# Altium PCB 创意时钟.PcbDoc
Units mil, origin at the board's own origin, x right, y up, seen from the top; angles counter-clockwise.
Board outline 3895.03 x 3911.69 mil, 2 copper layers (Top Layer, Bottom Layer); 73 components, 82 nets, 310 pads, 84 vias.
Unrouted connection lines stored in the file: 14.
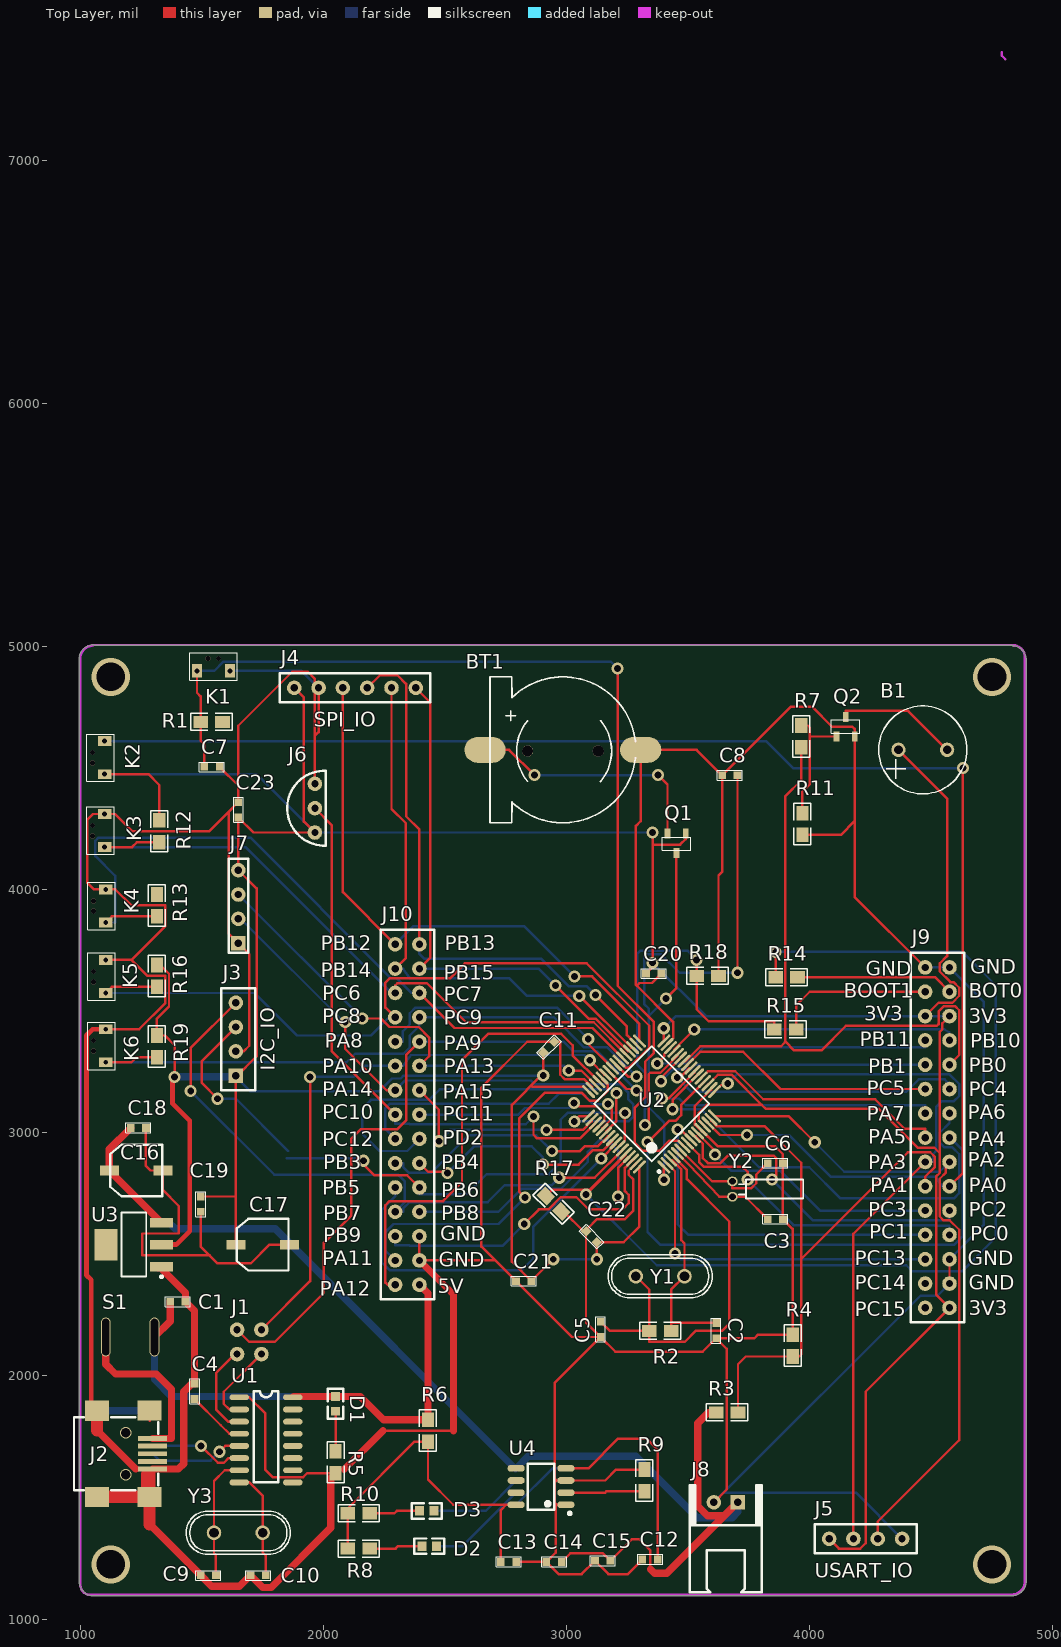
[diagram p0: Top Layer view]
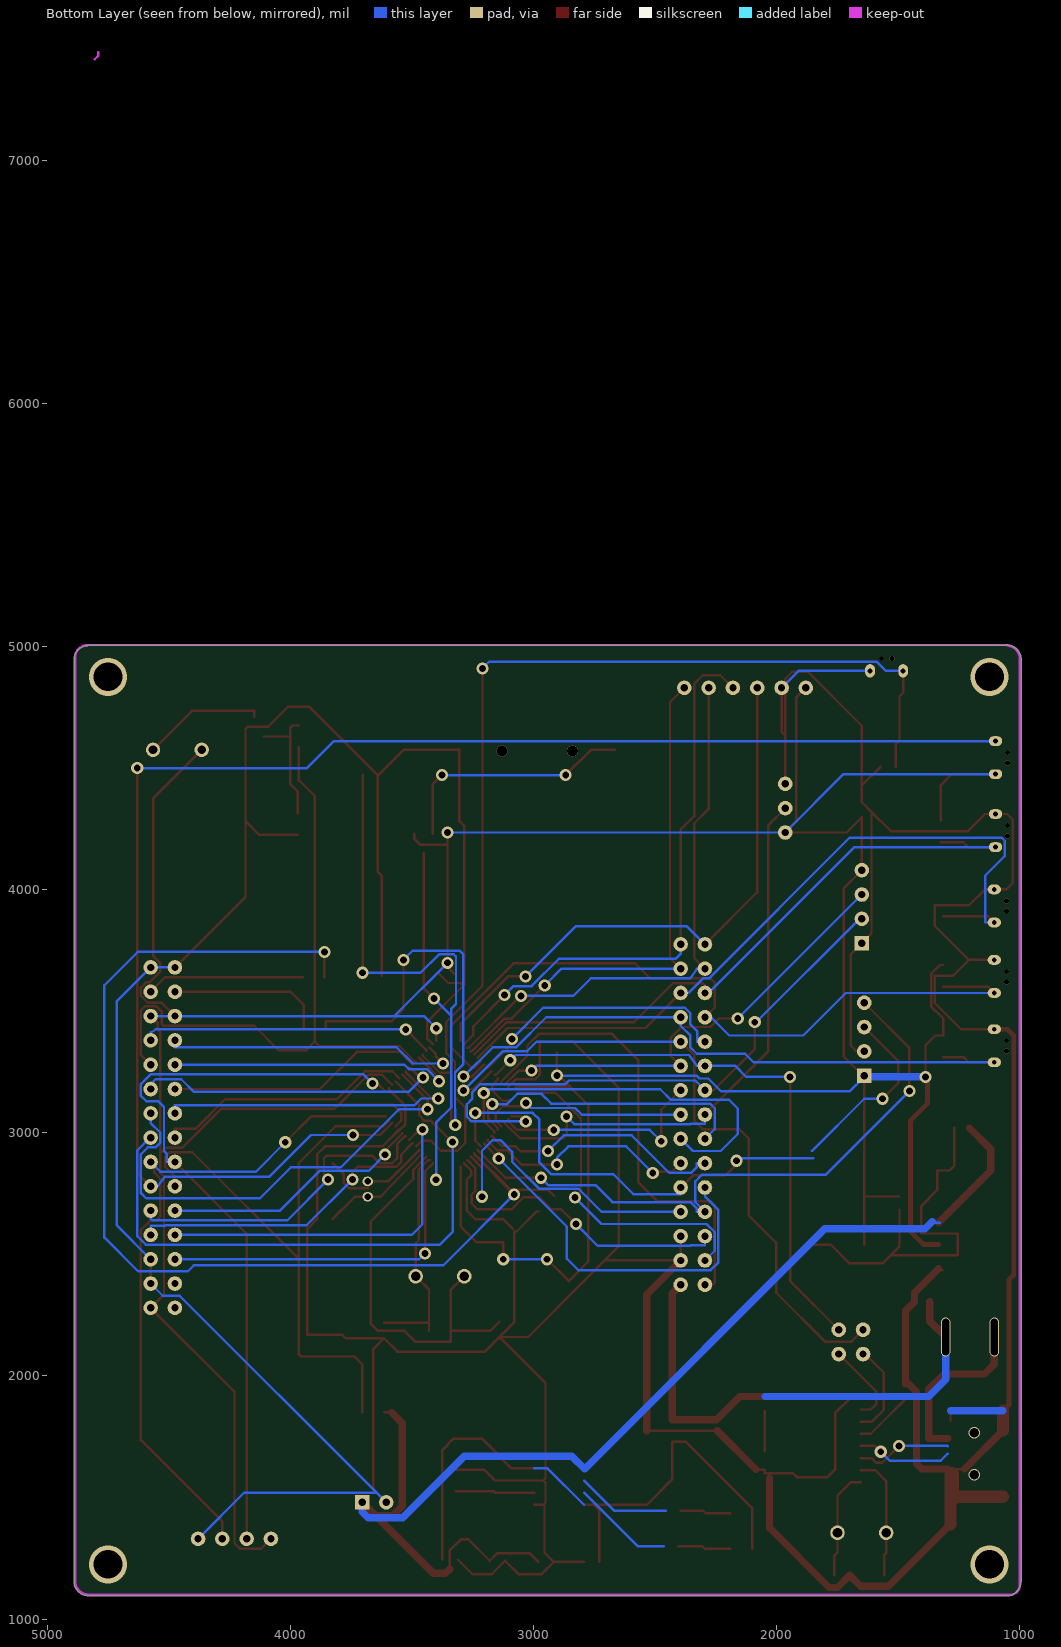
[diagram p1: Bottom Layer view, seen from below]

## Layer stack, top to bottom
Top Solder: solder mask 0.4, Solder Resist, Dk 3.5
Top Layer: signal copper 1.4
Dielectric 1: dielectric 12.6, FR-4, Dk 4.8
Bottom Layer: signal copper 1.4
Bottom Solder: solder mask 0.4, Solder Resist, Dk 3.5

## Board outline
996,1151.97 cw(c1000,1155) 994.99,1155 994.99,4947.64 cw(c1054.02,4947.64) 1054.02,5006.68 cw(c1054.02,5001.66) 1057.75,5005.02 4830,5005.02 cw(c4830,5000) 4833.03,5004 cw(c4830.98,4945) 4890.02,4945 4890.02,1155 cw(c4830.98,1155) 4833.03,1096 cw(c4830,1100) 4830,1094.98 1055,1094.98 cw(c1055,1154.02)

## Design rules (kind name [scope] priority, off if disabled: settings)
Clearance [All] p1: gap=5
PolygonConnect [All] p1: connectstyle=Relief reliefconductorwidth=10 reliefentries=4 polygonreliefangle="90 Angle" airgapwidth=10
RoutingVias [All] p1: holewidth=28 width=50 viastyle="Through Hole" minholewidth=28 minwidth=50 maxholewidth=28 maxwidth=50
SolderMaskExpansion [All] p1: expansion=4
Width [All] p1: maxlimit=200 minlimit=10 preferedwidth=10 minimp=50.000000 maximp=50.000000 favimp=50.000000
29 further rules are at their usual default settings.

## Components (designator, comment, footprint, x,y, rotation, side; value= is the part's Value field where it differs from the comment)
B1 "BEEP" BEEP-9.5X5.5 4465,4575 r0 top
BT1 "CR1220" BATERY 2615,4275 r0 top
C1 "CAP_10P_0603_FIRE" RES_0603_FIRE 1370,2305 r0 top
C2 "CAP_20P_0603_FIRE" CAP_0603_FIRE 3615,2155 r90 top
C3 "CAP_20P_0603_FIRE" CAP_0603_FIRE 3890,2645 r180 top
C4 "CAP_10P_0603_FIRE" RES_0603_FIRE 1470,1905 r90 top
C5 "CAP_20P_0603_FIRE" CAP_0603_FIRE 3140,2160 r90 top
C6 "CAP_20P_0603_FIRE" CAP_0603_FIRE 3890,2875 r180 top
C7 "CAP_20P_0603_FIRE" CAP_0603_FIRE 1510,4505 r0 top
C8 "CAP_10P_0603_FIRE" RES_0603_FIRE 3640,4470 r0 top
C9 "CAP_20P_0603_FIRE" CAP_0603_FIRE 1495,1180 r0 top
C10 "CAP_20P_0603_FIRE" CAP_0603_FIRE 1700,1180 r0 top
C11 "CAP_20P_0603_FIRE" CAP_0603_FIRE 2905,3330 r45 top
C12 "CAP_10P_0603_FIRE" RES_0603_FIRE 3375,1245 r180 top
C13 "CAP_10P_0603_FIRE" RES_0603_FIRE 2730,1235 r0 top
C14 "CAP_10P_0603_FIRE" RES_0603_FIRE 2980,1235 r180 top
C15 "CAP_10P_0603_FIRE" RES_0603_FIRE 3180,1240 r180 top
C16 "CAP+_47UF_FIRE" CAP+_47UF_FIRE 1230,2845 r90 top
C17 "CAP+_47UF_FIRE" CAP+_47UF_FIRE 1750,2540 r90 top
C18 "CAP_10P_0603_FIRE" RES_0603_FIRE 1270,3020 r180 top
C19 "CAP_10P_0603_FIRE" RES_0603_FIRE 1495,2675 r90 top
C20 "CAP_20P_0603_FIRE" CAP_0603_FIRE 3390,3655 r180 top
C21 "CAP_20P_0603_FIRE" CAP_0603_FIRE 2855,2390 r180 top
C22 "CAP_20P_0603_FIRE" CAP_0603_FIRE 3080,2595 r315 top
C23 "CAP_20P_0603_FIRE" CAP_0603_FIRE 1650,4360 r270 top
D1 "LED" 0603_R_JX 2050,1885 r270 top
D2 "LED" 0603_R_JX 2435,1300 r0 top
D3 "LED" 0603_R_JX 2425,1445 r0 top
J1 "mode" mode 1745,2190 r270 top
J2 "USB-MINI" USB_MINI_B_FE_JX 1305,1680 r0 top
J3 "OLED" OLED 1640,3235 r90 top
J4 "SPI_IO" SPI_IO 1880,4830 r0 top
J5 "UART_IO" USART_IO 4080,1330 r0 top
J6 "DS18B20" DS18B20 1965,4435 r270 top
J7 "SWD" SWD 1650,3780 r180 top
J8 "BATTERY" XH_2501R_2P_LOCKED_JX 3655,1480 r180 top
J9 "IO" IO 4575,2280 r180 top
J10 "IO" IO 2295,3775 r0 top
K1 "KEY" KEY 1480,4900 r0 top
K2 "KEY" KEY 1100,4475 r90 top
K3 "KEY" KEY 1100,4175 r90 top
K4 "KEY" KEY 1105,3865 r90 top
K5 "KEY" KEY 1105,3575 r90 top
K6 "KEY" KEY 1105,3290 r90 top
Q1 "BAT54C" SOT-23 3490,4230 r180 top
Q2 "8050" SOT-23 4110,4630 r0 top
R1 "10K" 0805 1585,4690 r180 top
R2 "1M" 0805 3430,2185 r180 top
R3 "1K" 0805 3705,1850 r180 top
R4 "1K" 0805 3930,2170 r270 top
R5 "1K" 0805 2050,1600 r90 top
R6 "0.25R" 0805 2430,1820 r270 top
R7 "1K" 0805 3965,4675 r270 top
R8 "1K" 0805 2190,1290 r180 top
R9 "1.2k" 0805 3320,1615 r270 top
R10 "1K" 0805 2190,1435 r180 top
R11 "10K" 0805 3970,4315 r270 top
R12 "RES" 0805 1325,4195 r90 top
R13 "RES" 0805 1315,3890 r90 top
R14 "510R" 0805 3950,3640 r180 top
R15 "510R" 0805 3855,3425 r0 top
R16 "RES" 0805 1315,3600 r90 top
R17 "10k" 0805 2915,2740 r315 top
R18 "10k" 0805 3535,3645 r0 top
R19 "RES" 0805 1315,3310 r90 top
S1 "Switch" SWITCH 1105,2160 r0 top
U1 "CH340G" SOP16 1610,1545 r0 top
U2 "STM32RCT6" LQFP64 3400,2860 r135 top
U3 "AMS1117" AMS-1117-3.3 1220,2540 r180 top
U4 "TP4056" SOP8_150MIL_JX 2895,1545 r90 top
Y1 "XTAL_8M_FIRE" XTAL_socket 3385,2410 r180 top
Y2 "XTAL_32.768KHZ_FIRE" CRYS-3X8 3690,2800 r180 top
Y3 "XTAL_8M_FIRE" XTAL_socket 1650,1355 r0 top

## Footprints (in the part's own frame and the unit in brackets; to place one, negate y for a bottom-side part, rotate by r counter-clockwise, add the part's x,y. Pads: shape width x height; smd on the part's side, far side on the other; paste and mask are expansions set on the pad)
0603_R_JX [mil]
  rect 36.61x38.58 smd: 1(-30.31,-0.11) 2(30.37,-0.11)
  silkscreen extent -62,-32 62,31
0805 [mil]
  rect 60x50 smd: 1(90,0) 2(0,0)
  silkscreen extent -40,-35 130,35
AMS-1117-3.3 [mm]
  rect 2.4x1 smd: 1(-2.9,2.3) 2(-2.9,0) 3(-2.9,-2.3)
  rect 2.4x3.3 smd: 4(2.9,0)
  silkscreen extent -3.03,-3.35 1.3,3.47
BATERY [mil]
  round 46 hole 46: 0(515,295) 0/2(225,295)
  oval 169.29x106.3 smd: 1(50,300) 2(690,300)
  silkscreen extent 70,0 668,600
BEEP-9.5X5.5 [mm]
  round 1.5 hole 0.9: 1(-2.54,0) 2(2.54,0)
  silkscreen extent -4.6,-4.6 4.6,4.6
CAP+_47UF_FIRE [mm]
  rect 1x2 smd: 1(0,2.8) 2(0,-2.8)
  silkscreen extent -2.7,-2.7 2.7,2.7
CAP_0603_FIRE [mm]
  rect 0.8x0.8 smd: 1(0,0) 2(1.6,0)
  silkscreen extent -0.5,-0.5 2.1,0.5
CRYS-3X8 [mm]
  oval 1.1x1 hole 0.7: 1(0.199,-0.003) 2(0.199,1.597)
  silkscreen extent -7.2,-0.2 -0.5,1.8
DS18B20 [mil]
  round 60 hole 30: 1(0,0) 2(100,0) 3(200,0)
  silkscreen extent -55,-114 256,46
IO [mil]
  round 60 hole 30: 1(0,0) 2(100,0) 3(0,-100) 4(100,-100) 5(0,-200) 6(100,-200) 7(0,-300) 8(100,-300) 9(0,-400) 10(100,-400) 11(0,-500) 12(100,-500) 13(0,-600) 14(100,-600) 15(0,-700) 16(100,-700) 17(0,-800) 18(100,-800) 19(0,-900) 20(100,-900) 21(0,-1000) 22(100,-1000) 23(0,-1100) 24(100,-1100) 25(0,-1200) 26(100,-1200) 27(0,-1300) 28(100,-1300) 29(0,-1400) 30(100,-1400)
  silkscreen extent -60,-1460 160,60
KEY [mil]
  rect 40x55 / inner rect 40x55 / far side oval 40x55 hole 20: 1(0,0) 2(136,0)
  silkscreen extent -30,-39 165,74
LQFP64 [mm] "SOT-223/SC-73; 4 Leads; Body 6.7 x 7.3 mm, inc. leads (LxW max)"
  oval 1.8x0.3 smd: 1(0,0) 2(0,-0.5) 3(0,-1) 4(0,-1.5) 5(0,-2) 6(0,-2.5) 7(0,-3) 8(0,-3.5) 9(0,-4) 10(0,-4.5) 11(0,-5) 12(0,-5.5) 13(0,-6) 14(0,-6.5) 15(0,-7) 16(0,-7.5) 33(11.1,-7.5) 34(11.1,-7) 35(11.1,-6.5) 36(11.1,-6) 37(11.1,-5.5) 38(11.1,-5) 39(11.1,-4.5) 40(11.1,-4) 41(11.1,-3.5) 42(11.1,-3) 43(11.1,-2.5) 44(11.1,-2) 45(11.1,-1.5) 46(11.1,-1) 47(11.1,-0.5) 48(11.1,0)
  oval 0.3x1.8 smd: 17(1.8,-9.3) 18(2.3,-9.3) 19(2.8,-9.3) 20(3.3,-9.3) 21(3.8,-9.3) 22(4.3,-9.3) 23(4.8,-9.3) 24(5.3,-9.3) 25(5.8,-9.3) 26(6.3,-9.3) 27(6.8,-9.3) 28(7.3,-9.3) 29(7.8,-9.3) 30(8.3,-9.3) 31(8.8,-9.3) 32(9.3,-9.3) 49(9.3,1.8) 50(8.8,1.8) 51(8.3,1.8) 52(7.8,1.8) 53(7.3,1.8) 54(6.8,1.8) 55(6.3,1.8) 56(5.8,1.8) 57(5.3,1.8) 58(4.8,1.8) 59(4.3,1.8) 60(3.8,1.8) 61(3.3,1.8) 62(2.8,1.8) 63(2.3,1.8) 64(1.8,1.8)
  silkscreen extent -0.12,-8 9.8,0.82, body extent 0.55,-8.75 10.55,1.25, height 1.6
mode [mil]
  round 60 hole 30: 1(0,0) 2(0,-100) 3(100,0) 4(100,-100)
OLED [mil]
  rect 60x60 hole 30: 1(0,0)
  round 60 hole 30: 2(100,0) 3(200,0) 4(300,0)
  silkscreen extent -60,-80 360,60
RES_0603_FIRE [mm]
  rect 0.8x0.8 smd: 1(0,0) 2(1.6,0)
  silkscreen extent -0.51,-0.53 2.1,0.52
SOP8_150MIL_JX [mm]
  oval 0.7x1.8 smd: 1(-1.905,-2.601) 2(-0.635,-2.601) 3(0.635,-2.601) 4(1.905,-2.601) 5(1.905,2.601) 6(0.635,2.601) 7(-0.635,2.601) 8(-1.905,2.601)
  silkscreen extent -2.95,-3.15 2.4,1.4
SOP16 [mil]
  oval 80x24 smd: 1(44,367) 2(44,317) 3(44,267) 4(44,217) 5(44,167) 6(44,117) 7(44,67) 8(44,17) 9(264,17) 10(264,67) 11(264,117) 12(264,167) 13(264,217) 14(264,267) 15(264,317) 16(264,367)
  silkscreen extent 104,17 204,392
SOT-23 [mm]
  rect 0.6x1.05 smd: 1(0,0) 2(1.9,0) 3(0.965,2.032)
  silkscreen extent -0.55,0.35 2.45,1.75
SPI_IO [mil]
  round 60 hole 30: 1(0,0) 2(100,0) 3(200,0) 4(300,0) 5(400,0) 6(500,0)
  silkscreen extent -60,-60 560,60
SWD [mil]
  rect 60x60 hole 30: 1(0,0)
  round 60 hole 30: 2(0,-100) 3(0,-200) 4(0,-300)
  silkscreen extent -40,-347 40,40
SWITCH [mil]
  oval 40x160 hole 30 slot 150 at 90 deg: 1(0,0) 2(200,0)
USART_IO [mil]
  round 60 hole 30: 1(0,0) 2(100,0) 3(200,0) 4(300,0)
  silkscreen extent -60,-60 360,60
USB_MINI_B_FE_JX [mm]
  rect 3x0.5 smd: 1(-0.2,1.6) 2(-0.2,0.8) 3(-0.2,0) 4(-0.2,-0.8) 5(-0.2,-1.6)
  rect 2.5x2.1 smd: 5(-6,4.496) 5(-5.999,-4.501) 5(-0.5,4.501) 5(-0.498,-4.501)
  silkscreen extent -8.4,-3.8 0.4,3.8
XH_2501R_2P_LOCKED_JX [mm]
  rect 1.5x1.5 hole 0.81: 1(-1.25,0)
  round 1.5 hole 0.81: 2(1.25,-0.001)
  silkscreen extent -3.75,-1.8 3.75,9.4
XTAL_socket [mil]
  round 60 hole 40: 1(100,0) 2(-100,0)
  silkscreen extent -215,-89 214,89

## Part data
C1 C4 C8 C12 C13 C14 C15 C18 C19: "0603"
J8: library part BATTER
Q2: "NPN"
R1 R2 R3 R4 R5 R6 R7 R8 R9 R10 R11 R14 R15 R17 R18: library part RES
Y1 Y2 Y3: "CRYSTAL"

## Via types
v1: diameter 50, hole 28, Top Layer to Bottom Layer, 66 vias
v2: diameter 21, hole 21, Top Layer to Bottom Layer, 12 vias
v3: diameter 157, hole 118, Top Layer to Bottom Layer, 4 vias
v4: diameter 47.24, hole 39.37, Top Layer to Bottom Layer, 2 vias

## Nets (pads, with @x,y where several pads share a name; then routed paths per layer and width w, separated by ;. In a path a pad name is that pad's centre, name@x,y a point inside that pad or via, vN(x,y) a via of type N, cw(c..) or ccw(c..) an arc to the next point about the centre after c; other vN are vias at no path point)
3V3: B1.1 C11.1 C17.1 C19.2 C20.2 C21.1 C22.2 C23.2 J3.1 J4.1 J5.1 J6.3 J7.4 J9.1 J9.25 J9.26 K2.1 Q1.1 R12.1 R16.1 R19.1 U2.13 U2.19 U2.32 U2.48 U2.64 U3.2 | length 18366.3
  Top Layer w10: K2.1 1280,4475 1325,4430 R12.1 ; R16.1 1329,3690 1365,3654 1365,3520 1315,3470 R19.1 1348,3400 1388,3360 v1(1388,3230) ; C19.2 1636.77,2737.99 ; C17.1 1639.76,2887 1640,2887.24 1640,3230 1725,3315 1725,4005 J7.4 C23.2 1712.01,4235 J6.3 1920,4280 1920,4790 J4.1 ; 2859,3190 3070,3190 U2.48@3080,3180 ; 2905,3270 C11.1 2904,3329 v1(2904,3235) 2895,3235 2775,3115 2775,2470 C21.1 v1(2945,2480) ; v1(3124.54,2480) C22.2 3235.46,2550.46 3299.78,2614.78 U2.64 ; C20.2 3354,3682 v1(3354,3699) v1(3354,4235) ; 3355,4185 3467,4185 3490,4208 Q1.1 ; U2.32 v1(3400,3430) ; U2.13 3544,3050.07 3544,3081.84 3577.16,3115 3803,3115 ; U2.19 3622.1,3238 3680,3238 3803,3115 ; J5.1 4120,1290 4208,1290 4230,1312 4230,1935 J9.1 4520,2335 4520,2820 4535,2835 4535,2916 ; B1.1 4565,4375 4565,3726.57 4535,3696.57 4535,3663.43 4578.43,3620 4591.57,3620 4615,3596.57 4615,3563.43 4586.57,3535 4530,3535 J9.26 ; J9.25 4545,3450 4545,3425 4535,3415 4535,2916 ; 3803,3115 3820,3098 4285,3098 4444,2939 4512,2939 4535,2916
  Top Layer w20: U3.2 1395,2540 1450,2595 1450,3050 1380,3120 1380,3227 v1(1388,3230)
  Bottom Layer w10: K2.1 1725,4475 J6.3 v1(3354,4235) ; J3.1@1640,3230 1700,3170 2228.19,3170 2281.38,3223.19 2318.19,3223.19 2330,3235 v1(2904,3235) ; v1(2945,2480) v1(3124.54,2480) ; v1(3354,3699) 3573,3480 ; v1(3400,3430) 3450,3480 3573,3480 ; J9.25 J9.26 3573,3480
  Bottom Layer w30: v1(1388,3230) J3.1@1640,3230
5V: C1.1 D1.1 J10.30 R6.2 S1.2 U1.16 | length 2280.7
  Top Layer w30: S1.2 1370,2225 C1.1 ; U1.16@1877.31,1915.31 D1.1 2152,1915.31 2247.31,1820 R6.2 2430,2340 J10.30
  Bottom Layer w30: S1.2 1305,1985 1374.69,1915.31 2048.2,1915.31
BATT: C14.1 C15.1 C16.1 C18.2 J8.1 R3.1 U3.3 U4.5 | length 5067.8
  Top Layer w10: C14.1 3015,1270 3150,1270 C15.1 3268,1328 3299,1328 3345,1282 3345,1205 ; 3584,1850 R3.1
  Top Layer w30: C16.1 U3.3 ; C16.1 1119.76,2932.76 C18.2 ; 3345,1205 3362,1188 3412.2,1188 J8.1 ; 3584,1850 3540,1806 3540,1465 3580,1425 3649.2,1425
  Bottom Layer w10: 1330,2630 1370,2630
  Bottom Layer w30: 1360,2635 1390,2605 1802.4,2605 2790,1617.4 2842.6,1670 3285,1670 3538,1417 3681.21,1417 3704.21,1440 J8.1
BOOT0: R14.1 R17.2 U2.60 | length 4617.1
  Top Layer w10: R17.2 2940,2765 3093.42,2765 U2.60 3244.1,2910.34 v1(3079.77,2746) ; R14.1 v1(3860,3744)
  Bottom Layer w10: v1(3079.77,2746) 3370.77,2455 4397,2455 4422,2430 4626,2430 4765,2569 4765,3607 4628,3744 v1(3860,3744)
BOOT1: R15.2 R18.2 U2.28 | length 1931
  Top Layer w10: v1(3322,3032) 3338,3048 3338,3241 3344,3247 3385.89,3247 3455.68,3316.78 U2.28 ; v1(3535,3711) R18.2 3535,3508 3584,3459 3855,3459 R15.2
  Bottom Layer w10: v1(3322,3032) 3322,3096 3323,3097 3323,3248 3290,3281 3290,3734.99 3304,3749 3497,3749 v1(3535,3711)
GND: BT1.2 C1.2 C2.1 C3.1 C4.2 C5.1 C6.1 C7.2 C8.1 C9.1 C10.1 C11.2 C12.2 C13.2 C14.2 C15.2 C20.1 C21.2 C22.1 C23.1 J2.5 J3.2 J4.2 J5.4 J6.1 J7.1 J8.2 J9.3 J9.5 J9.29 J9.30 J10.26 J10.28 K1.2 K3.2 K4.2 K5.2 K6.2 Q2.2 R4.2 R5.2 R9.2 R11.1 R17.1 R18.1 U1.1 U2.12 U2.18 U2.31 U2.47 U2.63 U3.1 U4.1 U4.3 | length 28987.3
  Top Layer w10: K6.2 1242,3426 1350,3534 1350,3645 1276,3645 1210,3711 ; K5.2 1210,3711 ; 1227.99,1617.01 J2.5@1297.14,1617.01 ; J2.5@1280.4,1492.8 J2.5@1285.4,1502.8 ; 1285.32,1815.32 J2.5@1285.32,1857.2 ; U3.1@1318.86,2434.14 U3.1 U3.1@1334.17,2440.83 ; C7.2 1650,4427.99 ; J3.2 1672,3335 1695,3358 1695,3735 J7.1 1610,3820 1610,4320 ; U1.1 1695,1912 1760,1847 1760,1615 1791,1584 1917,1584 1933,1600 R5.2 2050,1615 2085,1615 ; J6.1 1965,4633 ; J4.2 1980,4648 1965,4633 ; 2245,1775 2535,1775 ; J10.26 J10.28 2707.01,2475 ; C13.2 C14.2 ; 2960,1470 2951,1479 2951,1561 2960,1570 ; R17.1 2988,2676.36 3069.36,2595 C22.1 3080,2220 C5.1 ; U4.1 2955,1470 2955,1272.99 C14.2 ; C22.1@3085,2605 3125,2645 3240,2645 3275,2680 3275,2807.54 3256,2826.54 3256,2844.06 U2.63 ; U2.47 3104.91,3188.28 3072.21,3220.97 2992,3220.97 2974,3238.97 2974,3374.54 C11.2 2838.55,3374.54 2650,3185.99 2650,2532.01 C21.2 3022.01,2160 C5.1 ; 3289,3605 3300,3616 3351,3616 C20.1 ; C12.2 3252.01,1185 3172.01,1185 C15.2 3062.01,1185 2967.01,1185 C14.2 ; R9.2 3204,1615 3159,1570 U4.3 2960,1570 ; U2.31 3438,3387.96 3438,3456 3285,3609 3285,4262 3305,4282 BT1.2 3535,4575 C8.1 ; U2.12 3595.44,2970.79 ; U2.18 3594.87,3177.59 3527.19,3109.91 3527.19,3033.69 3551.46,3011.32 3595.44,2970.79 ; J8.2 3659,1533.23 3659,2111 C2.1 ; R18.1 3625,4058 3640,4073 C8.1 ; R11.1 4128,4225 4184.8,4281.8 ; J9.30 4184.8,3970.2 4184.8,4281.8 ; J9.3 J9.5 ; 1210,3711 1350,3851 1350,3935 1210,3935 1144,4001 K4.2 1056,4001 1029,4028 1029,4288 1052,4311 K3.2 1143,4311 1213,4241 1531,4241 1610,4320 ; 1610,4320 C23.1 1650,4427.99 ; 1650,4427.99 1650,4674 1872,4896 1936,4896 1965,4867 1965,4633 ; 2960,1570 2951,1579 2951,1971 C5.1 ; C5.1 3200,2100 3560,2100 C2.1 ; 3595.44,2970.79 3622.23,2944 3858,2944 3890,2912 C6.1 C3.1 3930,2605 R4.2 3788,2170 3773,2155 C2.1 ; C8.1 3923,4753 4009,4753 4092,4670 4176,4670 4184.8,4661.2 Q2.2 4184.8,4281.8
  Top Layer w20: J2.5@1068.78,1857 1045,1880.78 1045,2395 1025,2415 1025,3400 1051,3426 K6.2
  Top Layer w30: 1068.78,1776.22 1227.99,1617.01 ; 1285.4,1389.6 C9.1 1540,1135 1655,1135 C10.1 1750,1130 1785,1130 2030,1375 R5.2@2030,1580 ; J2.5@1297.14,1617.01 1403,1617.01 1425,1639.01 1425,1935 1457.99,1967.99 C4.2 1470,2267.99 C1.2 1432.99,2342.01 U3.1@1334.17,2440.83 ; 2085,1615 2245,1775 ; J10.28 2535,2335 2535,1775
  Top Layer w50: J2.5@1068.8,1502.8 1285.4,1502.8 1285.4,1389.6 ; 1068.78,1776.22 J2.5@1068.78,1857
  Top Layer w60: 1279.98,1595 J2.5@1280.4,1492.8
  Bottom Layer w10: 1068.78,1857 1068.98,1857.2 ; K1.2 1910,4900 J4.2 ; J8.2 3645.77,1520 ; J5.4 4190,1520 3645.77,1520 ; J9.30 J9.29 4715,3540 4715,2620 J9.5 ; J9.3 4525,2330 4455.77,2330 3645.77,1520
  Bottom Layer w30: 1068.98,1857.2 1285.32,1857.2
NetB1_2: B1.2 Q2.3 | length 508.3
  Top Layer w10: Q2.3 4148,4735 4405,4735 B1.2
NetBT1_1: BT1.1 Q1.2 | length 1011.3
  Top Layer w10: BT1.1 2764,4575 v1(2868,4471) ; v1(3376,4471) 3415.2,4431.8 Q1.2
  Bottom Layer w10: v1(2868,4471) v1(3376,4471)
NetC4_1: C4.1 U1.4 | length 243.2
  Top Layer w10: C4.1 1578,1797 1613,1762 U1.4
NetC9_2: C9.2 U1.7 Y3.2 | length 513.5
  Top Layer w10: C9.2 1557.99,1263 1550,1270.99 Y3.2 1550,1568 1594,1612 U1.7
NetC10_2: C10.2 U1.8 Y3.1 | length 451.7
  Top Layer w10: U1.8 1696,1562 1750,1508 Y3.1 1750,1273.99 1762.99,1261 C10.2
NetC12_1: C12.1 C13.1 R6.1 R8.1 R10.1 U4.4 U4.8 | length 2579.8
  Top Layer w10: R8.1 R10.1 2100,1455 2375,1730 R6.1 2430,1574 2534,1470 2752,1470 ; C13.1 2730,1448 2752,1470 ; U4.8 2752,1470 ; U4.4 3090,1620 3212,1742 3329,1742 3375,1696 C12.1
  Bottom Layer w10: 2792.6,1470 2942.6,1620 2997.4,1620
NetC16_2: C16.2 C17.2 C18.1 C19.1 | length 1613.2
  Top Layer w10: C18.1 1270,2864 1289,2845 C16.2@1340,2845 ; C16.2 C16.2@1340,2845 ; C19.1@1495,2683 1495,2533 1565,2463 1701,2463 1778,2540 C17.2 ; 1532,2496 1255,2496 1255,2585.69 1405,2585.69 1405,2699 1340,2764 C16.2@1340,2845
NetD1_2: D1.2 R5.1 | length 164.7
  Top Layer w10: D1.2 2049.89,1772.11 2050,1772 R5.1
NetD2_1: D2.1 R8.2 | length 218.8
  Top Layer w10: R8.2 2297,1290 2306.89,1299.89 D2.1
NetD2_2: D2.2 U4.7 | length 418.4
  Bottom Layer w10: 2465.37,1299.89 2572.49,1299.89 2792.6,1520
NetD3_1: D3.1 R10.2 | length 208.8
  Top Layer w10: R10.2 2292,1435 2301.89,1444.89 D3.1
NetD3_2: D3.2 U4.6 | length 389.1
  Bottom Layer w10: 2455.37,1444.89 2667.49,1444.89 2792.6,1570
NetJ1_3: J1.3 U1.2 | length 342.7
  Top Layer w10: U1.2 1613,1862 1590,1885 1590,1935 J1.3
NetJ1_4: J1.4 U1.3 | length 384.4
  Top Layer w10: J1.4 1636,2090 1560,2014 1560,1860 1608,1812 U1.3
NetJ2_2: J2.2 U1.6 | length 393.5
  Top Layer w10: v1(1497,1712) 1566.01,1642.99 1591,1642.99 1610.01,1662 U1.6
  Bottom Layer w10: 1297.14,1711.5 1297.64,1712 v1(1497,1712)
NetJ2_3: J2.3 U1.5 | length 393.3
  Top Layer w10: v1(1572,1688) 1596,1712 U1.5
  Bottom Layer w10: 1297.14,1680 1325.14,1652 1536,1652 v1(1572,1688)
NetJ9_27: J9.27 R14.2 | length 649.9
  Top Layer w10: R14.2 4515,3640 J9.27
NetJ9_28: J9.28 R15.1 | length 652.8
  Top Layer w10: R15.1 3945,3525 4000,3580 J9.28
NetQ2_1: Q2.1 R7.2 R11.2 | length 512.7
  Top Layer w10: R7.2 3992,4675 4000,4667 4000,4630 ; R11.2 3970,4403 4000,4433 4000,4630 ; Q2.1 4000,4630
NetR9_1: R9.1 U4.2 | length 324.7
  Top Layer w10: U4.2 3159,1520 3164,1525 R9.1
OSC_IN1: C2.2 R2.2 U2.3 Y1.2 | length 937.4
  Top Layer w10: U2.3 3433.18,2887.84 3472,2849.02 3472,2558 3485,2545 Y1.2 3430,2355 3430,2217.99 ; R2.2 3430,2217.99 ; C2.2 3430,2217.99
OSC_IN2: C3.2 U2.5 Y2.2 | length 485.6
  Top Layer w10: U2.5 3457.67,2915.68 3628.87,2737.14 Y2.2 3734.86,2737.14 C3.2
OSC_OUT1: C5.2 R2.1 U2.4 Y1.1 | length 1650.9
  Top Layer w10: C5.2 3177.99,2185 R2.1 ; Y1.1 3340,2355 R2.1 ; U2.4 3441.76,2900.47 3494.66,2847.57 3494.66,2809.66 3670,2634.32 3670,2215 3640,2185 3531,2185 3486,2140 3340,2140 R2.1
OSC_OUT2: C6.2 U2.6 Y2.1 | length 502.3
  Top Layer w10: U2.6 3599.06,2800.14 Y2.1 3682.17,2772.29 3760,2772.29 3780,2792.29 3780,2827.99 C6.2
PA0: J9.11 K2.2 U2.14 | length 6424.3
  Top Layer w10: U2.14 3630.9,2991 v1(3742,2991) ; J9.11 4630,2835 v1(4630,4500)
  Bottom Layer w10: K2.2 3821,4611 3932,4500 v1(4630,4500) ; v1(3742,2991) 3915,2991 4086,2820 4516,2820 4546,2780 J9.11
PA1: J9.12 R3.2 R4.1 U2.15 | length 2587.8
  Top Layer w10: U2.15 3594.87,3049.53 3618.16,3026.24 3815.76,3026.24 3965,2877 3965,2481 ; R3.2 3705,2048 3737,2080 R4.1 3957,2080 3965,2088 3965,2481 ; J9.12 4475,2820 4515,2860 4515,2901 4496,2920 4404,2920 3965,2481
PA2: J5.3 J9.13 U2.16 | length 2830.7
  Top Layer w10: U2.16 3913.21,3068.79 v1(4021,2961) ; J5.3 4280,1401 4615,1736 4615,2601 4576,2640 4551,2640 4535,2656 4535,2811 4560,2836 4560,2865 J9.13
  Bottom Layer w10: v1(4021,2961) 4142,2840 4535,2840 J9.13
PA3: J5.2 J9.14 U2.17 | length 3154.2
  Top Layer w10: U2.17 3636.24,3196.46 3663,3196.46 v1(3663,3203) ; J5.2 4180,2585 J9.14
  Bottom Layer w10: v1(3663,3203) 3700,3240 4575,3240 4615,3200 4615,3152 4593,3130 4544,3130 4520,3106 4520,2925 4508,2913 4508,2880 J9.14
PA4: J9.15 U2.20 | length 2494.1
  Top Layer w10: v1(3333,2962) 3334.34,2962 3421.57,3049.22 3448.22,3049.22 3471,3072 3471,3114.74 U2.20
  Bottom Layer w10: v1(3333,2962) 3333,2592 3385,2540 4595,2540 4630,2575 4630,2927 4577,2980 J9.15
PA5: J9.16 U2.21 | length 1067.8
  Top Layer w10: U2.21 3581.42,3253 3694,3253 3809,3138 4269,3138 4391,3016 4475,3016 J9.16
PA6: J9.17 U2.22 | length 1920.9
  Top Layer w10: v1(3436,3097) 3436,3135.41 U2.22
  Bottom Layer w10: v1(3436,3097) 3553,3097 3792,2858 3998,2858 4126,2730 4593,2730 4615,2752 4615,2912 4587,2940 4555,2940 4535,2960 4535,3000 4575,3040 J9.17
PA7: J9.18 U2.23 | length 1309.9
  Top Layer w10: v1(3392,3141) 3418.54,3141 3525.27,3247.74 U2.23
  Bottom Layer w10: v1(3392,3141) 3462,3141 3490,3113 4475,3113 J9.18
PA8: J10.9 U2.41 | length 1117.7
  Top Layer w10: v1(3089,3386) 3089,3365.87 U2.41
  Bottom Layer w10: J10.9 2326.5,3375 2326.5,3417.29 2355,3445.79 2355,3491.57 2378.43,3515 2960,3515 v1(3089,3386)
PA9: J1.2 J10.10 U2.42 | length 2887.3
  Top Layer w10: J1.2@1642.5,2207.5 J1.2@1662.5,2207.5 ; J1.2 1695,2140 1800,2140 2001.88,2341.88 2001.88,2546.88 2115,2660 2115,2976 2154,3015 2304,3015 2340,3051 2340,3320 J10.10 ; U2.42 3247.03,3180 3282,3180 v1(3288,3174)
  Bottom Layer w10: J10.10 2987,3375 3026,3336 3126,3336 v1(3288,3174)
PA10: J1.1 J10.11 U2.43 | length 2413.1
  Top Layer w10: J1.1 1945,2390 v1(1945,3230) ; v1(3095.77,3298.08) 3155.24,3238.61 U2.43
  Bottom Layer w10: v1@1950,3220 1960,3230 2125,3230 2170,3275 J10.11 2328,3275 2360,3320 3073.85,3320 v1(3095.77,3298.08)
PA11: J10.27 U2.44 | length 1601.7
  Top Layer w10: v1(2829,2734) 2805,2758 2805,3059 2911,3165 3062,3165 3095,3132 3128,3132 3170,3174 3170,3196.02 3146.67,3219.35 U2.44
  Bottom Layer w10: J10.27 2255,2515 2255,2592 2288,2625 2720,2625 v1(2829,2734)
PA12: J10.29 U2.45 | length 1931.7
  Top Layer w10: J10.29 2264,2375 2255,2384 2255,2702 2272,2719 2492,2719 2570,2797 2570,3300 2677,3407 2977.95,3407 3024.95,3360 3024.95,3318.57 U2.45
PA13: J7.3 J10.12 U2.46 | length 1918.8
  Top Layer w10: v1(2160,3470) 2237,3470 2272,3435 2392,3435 2435,3392 2435,3315 J10.12 ; v1(3009,3256) 3060.43,3256 3118.83,3197.6 U2.46
  Bottom Layer w10: J7.3 v1(2160,3470) ; J10.12 2990,3275 v1(3009,3256)
PA14: J7.2 J10.13 U2.49 | length 2422.6
  Top Layer w10: v1(2090,3455) 2090,3345 2260,3175 J10.13 ; v1(3032,3047) 3053.79,3068.79 U2.49
  Bottom Layer w10: J7.2 1660,3880 v1@2087.5,3452.5 ; J10.13 2335,3215 2854,3215 2869,3200 3219,3200 3253,3166 3253,3139 3275,3117 3275,3066.49 3255.51,3047 v1(3032,3047)
PA15: J10.14 U2.50 | length 914.6
  Top Layer w10: J10.14 2475,3095 v1(2475,2965) ; v1(2917,3012) 3067.38,3012 3102.92,3047.54 3102.92,3054.87 U2.50
  Bottom Layer w10: v1(2475,2965) 2522,3012 v1(2917,3012)
PB0: J9.21 R7.1 U2.26 | length 2770
  Top Layer w10: U2.26 3488.86,3294.29 3550.57,3356 3883,3356 3900,3375 ; R7.1 3965,4450 3900,4385 3900,3375 ; J9.21 4615,3320 4615,3504 4599,3520 4551,3520 4530,3499 4530,3447 4523,3440 4149,3440 4048,3339 3936,3339 3900,3375
PB1: J9.22 U2.27 | length 1267.2
  Top Layer w10: v1(3389,3212) v1@3373.39,3212 ; U2.27 v1@3373.39,3212 ; v1@3373.39,3212 3373,3211.61 3373,3212 v1@3373.39,3212
  Bottom Layer w10: v1(3389,3212) 3439,3262 3513,3262 3531,3280 J9.22
PB3: J10.19 U2.55 | length 1021.6
  Top Layer w10: v1(2940.06,2924.94) 3054.67,2924.94 3073.73,2944 3127.89,2944 3169.16,2985.27 U2.55
  Bottom Layer w10: J10.19 2328,2875 2328,2859 2352,2835 2442,2835 2597,2990 2875,2990 v1(2940.06,2924.94)
PB4: J10.20 U2.56 | length 931.1
  Top Layer w10: J10.20 2430,2840 v1@2495,2840 ; v1(2903,2869.36) 3049.36,2869.36 3109,2929 3151.41,2929 3188.42,2966.01 U2.56
  Bottom Layer w10: v1(2510,2835) 2619,2944 2857,2944 2903,2898 v1(2903,2869.36)
PB5: J10.21 U2.57 | length 1602.5
  Top Layer w10: v1(3143,2894) 3202.34,2953.34 U2.57
  Bottom Layer w10: J10.21 2295,2738 2240,2683 2240,2467 2272,2435 2816,2435 2863.31,2482.31 2863.31,2614.31 v1(3143,2894)
PB6: J3.3 J10.22 U2.58 | length 2640.4
  Top Layer w10: v1(1565,3140) 1500,3205 1500,3295 J3.3 ; 2140,2895 2210,2825 2345,2825 J10.22 ; U2.58 3240,2967.25 v1(3240,3082)
  Bottom Layer w10: v1(1565,3140) 1640,3140 1855,2925 ; 1850,2895 v1@2165,2895 ; J10.22 2395,2748 2590,2748 2672,2830 2928,2830 2976,2878 2976,3054 3004,3082 v1(3240,3082)
  other v1: 2165,2885
PB7: J3.4 J10.23 U2.59 | length 2665
  Top Layer w10: v1(1454,3172) 1454,3349 J3.4 ; v1(2970,2815) 3115.59,2815 U2.59
  Bottom Layer w10: v1(1454,3172) 1798,2828 2307,2828 2335,2800 2335,2715 J10.23 2328,2675 2328,2688 2355,2715 2676,2715 2746,2785 2940,2785 v1(2970,2815)
PB8: J10.24 U2.61 | length 1354.3
  Top Layer w10: v1(3212,2737) 3212,2855.74 U2.61
  Bottom Layer w10: J10.24 2720,2675 2814,2769 2976,2769 3088,2881 3088,2922 3136,2970 3168,2970 3212,2926 v1(3212,2737)
PB9: J10.25 U2.62 | length 1310
  Top Layer w10: v1(2826,2625) 2886,2685 2925,2685 2975,2735 3041,2735 3091,2685 3230,2685 3255,2710 3255,2745 3240,2760 3240,2855.9 U2.62
  Bottom Layer w10: J10.25 2295,2537 2353,2537 2355,2535 2736,2535 v1(2826,2625)
PB10: J9.23 U2.29 | length 1209.3
  Top Layer w10: U2.29 3441.76,3341.39 v1(3525.37,3425)
  Bottom Layer w10: v1(3525.37,3425) 4553,3425 4575,3413 J9.23
PB11: J9.24 U2.30 | length 1245.4
  Top Layer w10: v1(3373,3285) 3402,3314 3402,3324.13 U2.30
  Bottom Layer w10: v1(3373,3285) 3496,3285 3563,3352 4475,3352 J9.24
PB12: J4.3 J10.1 U2.33 | length 2415.8
  Top Layer w10: J4.3 2080,3990 J10.1 ; v1(3033,3643) 3104.79,3643 3299.78,3448.01 U2.33
  Bottom Layer w10: J10.1 2369,3849 2827,3849 v1(3033,3643)
PB13: J4.4 J10.2 U2.34 | length 2395.4
  Top Layer w10: J4.4 2232,4882 2304,4882 2340,4846 2340,4302 2395,4247 J10.2 ; v1(3119,3566.8) 3248.23,3437.57 3248.23,3401.51 U2.34
  Bottom Layer w10: J10.2 2395,3736 2416,3715 2896.31,3715 3008,3603.31 3082.49,3603.31 v1(3119,3566.8)
PB14: J4.5 J10.3 U2.35 | length 2313.9
  Top Layer w10: J4.5 2280,4332 2339,4273 2339,3719 J10.3 ; v1(3052,3563) 3053.56,3563 3266.6,3349.96 U2.35
  Bottom Layer w10: J10.3 2328,3675 2355,3635 2765,3635 2837,3563 v1(3052,3563)
PB15: J4.6 J10.4 U2.36 | length 2201.1
  Top Layer w10: J4.6 2439,4771 2439,3719 J10.4 ; v1(2954,3606.01) 3090.46,3469.55 3119.18,3469.55 3252.68,3336.04 U2.36
  Bottom Layer w10: J10.4 2885.01,3675 v1(2954,3606.01)
PC0: J9.7 U2.8 | length 1291.8
  Top Layer w10: U2.8 3545,2909.87 3545,2880 3565,2860 3724,2860 3745,2839 v1(3745,2808)
  Bottom Layer w10: v1(3745,2808) 3933,2620 4515,2620 4517,2618 4575,2618 J9.7
PC1: J9.8 U2.9 | length 1498.2
  Top Layer w10: v1(3457,3014) 3468.71,3014 U2.9
  Bottom Layer w10: v1(3457,3014) 3457,2624 3501,2580 J9.8
PC2: J9.9 U2.10 | length 1364.4
  Top Layer w10: U2.10 3530.62,2985.27 3560,2955.89 3560,2896 3581,2875 3633.21,2875 3664.21,2906 3852,2906 3862,2896 3862,2825 v1(3845,2808)
  Bottom Layer w10: v1(3845,2808) 4013,2640 4567,2640 4575,2648 J9.9
PC3: J9.10 U2.11 | length 1078.2
  Top Layer w10: U2.11 3539.19,2997.91 3611,2926.1 v1(3611,2910)
  Bottom Layer w10: v1(3611,2910) 3678,2843 3880,2843 4043,2680 J9.10
PC4: J9.19 U2.24 | length 1267
  Top Layer w10: v1(3455,3227) 3466.57,3227 3506.02,3266.45 U2.24
  Bottom Layer w10: v1(3455,3227) 3514.04,3167.96 4396.96,3167.96 4449,3220 4555,3220 4575,3200 J9.19
PC5: J9.20 U2.25 | length 1062.7
  Top Layer w10: U2.25 3550.07,3333 3726.44,3333 3879.44,3180 J9.20
PC6: J10.5 K3.1 R12.2 U2.37 | length 2782
  Top Layer w10: K3.1 1213,4175 1233,4195 R12.2 ; J10.5 2295,3606 2304,3615 2426,3615 2586.45,3454.55 3111.68,3454.55 U2.37
  Bottom Layer w10: K3.1 1680,4175 2280,3575 J10.5
PC7: J10.6 K4.1 R13.2 U2.38 | length 3176.7
  Top Layer w10: K4.1 1130,3890 R13.2 ; J10.6 2539,3431 3107.39,3431 U2.38
  Bottom Layer w10: K4.1 1143,3865 1143,4057 1062,4138 1062,4201 1075,4214 1699.43,4214 2278.43,3635 2303,3635 2363,3575 J10.6
PC8: J10.7 K5.1 R16.2 U2.39 | length 3155.7
  Top Layer w10: K5.1 1130,3600 R16.2 ; J10.7 2255,3515 2255,3618 2272,3635 2520,3635 2582,3697 3083,3697 3340,3440 3340,3352 3255.22,3267.22 3243.33,3267.22 U2.39
  Bottom Layer w10: K5.1 1716,3575 1891,3400 2195,3400 2270,3475 J10.7
PC9: J10.8 K6.1 R19.2 U2.40 | length 2734.3
  Top Layer w10: K6.1 1210,3290 1230,3310 R19.2 ; U2.40 3203.63,3280.37 3252.99,3231 v1(3288,3231)
  Bottom Layer w10: K6.1 2095,3290 2130,3325 2329,3325 2355,3351 2355,3400.1 2395,3440.1 J10.8 2948,3475 3072,3351 3168,3351 v1(3288,3231)
PC10: J6.2 J10.15 U2.51 | length 2380.3
  Top Layer w10: J6.2 2034,4266 2034,3336 J10.15 ; v1(2864,3067) 2864,2992 2879,2977 3054.88,2977 U2.51
  Bottom Layer w10: J10.15 2295,3037 2353,3037 2355,3035 2832,3035 v1(2864,3067)
PC11: J10.16 U2.52 | length 859.5
  Top Layer w10: v1(3031.08,3122.5) 3044.58,3109 3124.62,3109 3156,3077.62 3156,3050.29 U2.52
  Bottom Layer w10: J10.16 2802,3075 2829,3102 3010.58,3102 v1(3031.08,3122.5)
PC12: J10.17 U2.53 | length 1227.2
  Top Layer w10: U2.53 3146.67,3018.45 3186,3057.79 3186,3102 v1(3170,3118)
  Bottom Layer w10: J10.17 2255,3015 2255,3101 2274,3120 2927,3120 2967,3160 3067,3160 3109,3118 v1(3170,3118)
PC13: J9.6 U2.2 | length 1422.1
  Top Layer w10: U2.2 3446,2841.84 v1(3446,2504)
  Bottom Layer w10: v1(3446,2504) 3470,2480 J9.6
PC14: J9.4
PC15: J9.2
PD2: J10.18 U2.54 | length 1657.4
  Top Layer w10: U2.54 3162.57,2999.19 3162.57,3006.52 3205,3048.95 v1(3205,3163)
  Bottom Layer w10: J10.18 2345,2925 2230,2925 2160,2995 2160,3100 2195,3135 2435,3135 2479,3179 3189,3179 v1(3205,3163)
POWER: J2.1 S1.1 | length 704.6
  Top Layer w30: S1.1 1105,2048 1145,2008 1312,2008 1375,1945 1375,1742.98 J2.1
RESET: C7.1 K1.1 R1.1 U2.7 | length 4453.3
  Top Layer w10: K1.1 1480,4810 1495,4795 R1.1 1495,4613 1510,4598 C7.1 ; v1(3210,4910) 3210,3605 3359,3456 3359,3328 3323,3292 3323,3146 3281,3104 3281,2958 3313,2926 3381,2926 3422.03,2967.03 3460,2967.03 U2.7
  Bottom Layer w10: K1.1 1551,4900 1589,4938 3182,4938 v1(3210,4910)
VBAT: C8.2 Q1.3 U2.1 | length 2952.8
  Top Layer w10: U2.1 3400,2808 v1(3401,2807) ; v1(3409,3552) 3452,3595 Q1.3 ; v1(3702.99,3658) C8.2
  Bottom Layer w10: v1(3401,2807) 3401,3042 3338,3105 3338,3481 ; v1(3409,3552) 3338,3481 ; v1(3702.99,3658) 3465,3658 3389,3734 3328,3734 3319,3725 3319,3530 3338,3511 3338,3481
VCC3.3: R1.2
pads on no net: BT1.0 BT1.0/2 J2.4 R13.1 U1.9 U1.10 U1.11 U1.12 U1.13 U1.14 U1.15 U3.4
copper on no net:
  other v2: 1055,3336 1055,3379 1055,3621 1055,3664 1055,3911 1055,3954 1050,4221 1050,4264 1050,4521 1050,4564 1526,4950 1569,4950
  other v3: 1125,1225 4750,1225 1125,4875 4750,4875
  other v4: 1186.9,1593.4 1186.9,1766.6

## Keep-outs
Keep-Out Layer:
  lines w10: 1000,1139.27 1000,4947.64 ; 1000,4950 cw(c1054.02,4950) 1054.02,5004.02 ; 1000.94,1144.99 ccw(c1039.76,1139.43) 1039.76,1100.21 ; 1039.76,1100 4830,1100 ; 1055.94,5006.3 4837.22,5006.3 ; 4790,7445 4790,7430 4805,7415 ; 4830.98,1100.98 ccw(c4830.98,1155) 4885,1155 4885,4957.3 ccw(c4837.22,4957.3) 4837.22,5005.08

## Silkscreen, mask and mechanical layers (free items; w line width, h text height)
Top Overlay:
  text "PB12" at 1990,3750 h60
  text "PB13" at 2500,3750 h60
  text "GND" at 4660,3655 h60
  text "GND" at 4230,3645 h60
  text "PB14" at 1990,3640 h60
  text "PB15" at 2495,3630 h60
  text "BOOT1" at 4140,3555 h60
  text "BOT0" at 4655,3555 h60
  text "PC6" at 1995,3545 h60
  text "PC7" at 2495,3540 h60
  text "3V3" at 4225,3460 h60
  text "PC8" at 1995,3450 h60
  text "3V3" at 4655,3450 h60
  text "PC9" at 2495,3445 h60
  text "PB11" at 4205,3355 h60
  text "PA8" at 2005,3350 h60
  text "PB10" at 4660,3350 h60
  text "PA9" at 2495,3340 h60
  text "PB0" at 4655,3250 h60
  text "PA10" at 1995,3245 h60
  text "PA13" at 2495,3245 h60
  text "PB1" at 4240,3245 h60
  text "PC5" at 4235,3155 h60
  text "PA14" at 1995,3150 h60
  text "PC4" at 4655,3150 h60
  text "PA15" at 2490,3140 h60
  text "PC10" at 1995,3055 h60
  text "PA6" at 4650,3055 h60
  text "PC11" at 2490,3050 h60
  text "PA7" at 4235,3050 h60
  text "PA5" at 4240,2955 h60
  text "PD2" at 2490,2950 h60
  text "PC12" at 1995,2945 h60
  text "PA4" at 4650,2945 h60
  text "PA2" at 4650,2860 h60
  text "PB3" at 2000,2850 h60
  text "PB4" at 2485,2850 h60
  text "PA3" at 4240,2850 h60
  text "PA1" at 4250,2755 h60
  text "PA0" at 4655,2755 h60
  text "PB5" at 1995,2745 h60
  text "PB6" at 2485,2735 h60
  text "PC3" at 4240,2655 h60
  text "PC2" at 4655,2655 h60
  text "PB7" at 2000,2640 h60
  text "PB8" at 2485,2640 h60
  text "PC1" at 4245,2565 h60
  text "GND" at 2480,2555 h60
  text "PC0" at 4660,2555 h60
  text "PB9" at 2000,2550 h60
  text "PA11" at 1995,2455 h60
  text "PC13" at 4185,2455 h60
  text "GND" at 4650,2455 h60
  text "GND" at 2475,2450 h60
  text "PC14" at 4185,2355 h60
  text "GND" at 4655,2355 h60
  text "5V" at 2470,2340 h60
  text "PA12" at 1985,2330 h60
  text "3V3" at 4655,2250 h60
  text "PC15" at 4185,2245 h60

## Text inside footprints (layer, text, board x,y; h text height)
J3: Top Overlay "I2C_IO" at 1820,3255 h100 r90
J5: Top Overlay "USART_IO" at 4020,1170 h60